# Altium PCB PCB_TPS54622.PcbDoc
Units mil, origin at the board's own origin, x right, y up, seen from the top; angles counter-clockwise.
Board outline 1230 x 1255 mil, 2 copper layers (Top Layer, Bottom Layer); 18 components, 11 nets, 53 pads, 0 vias.
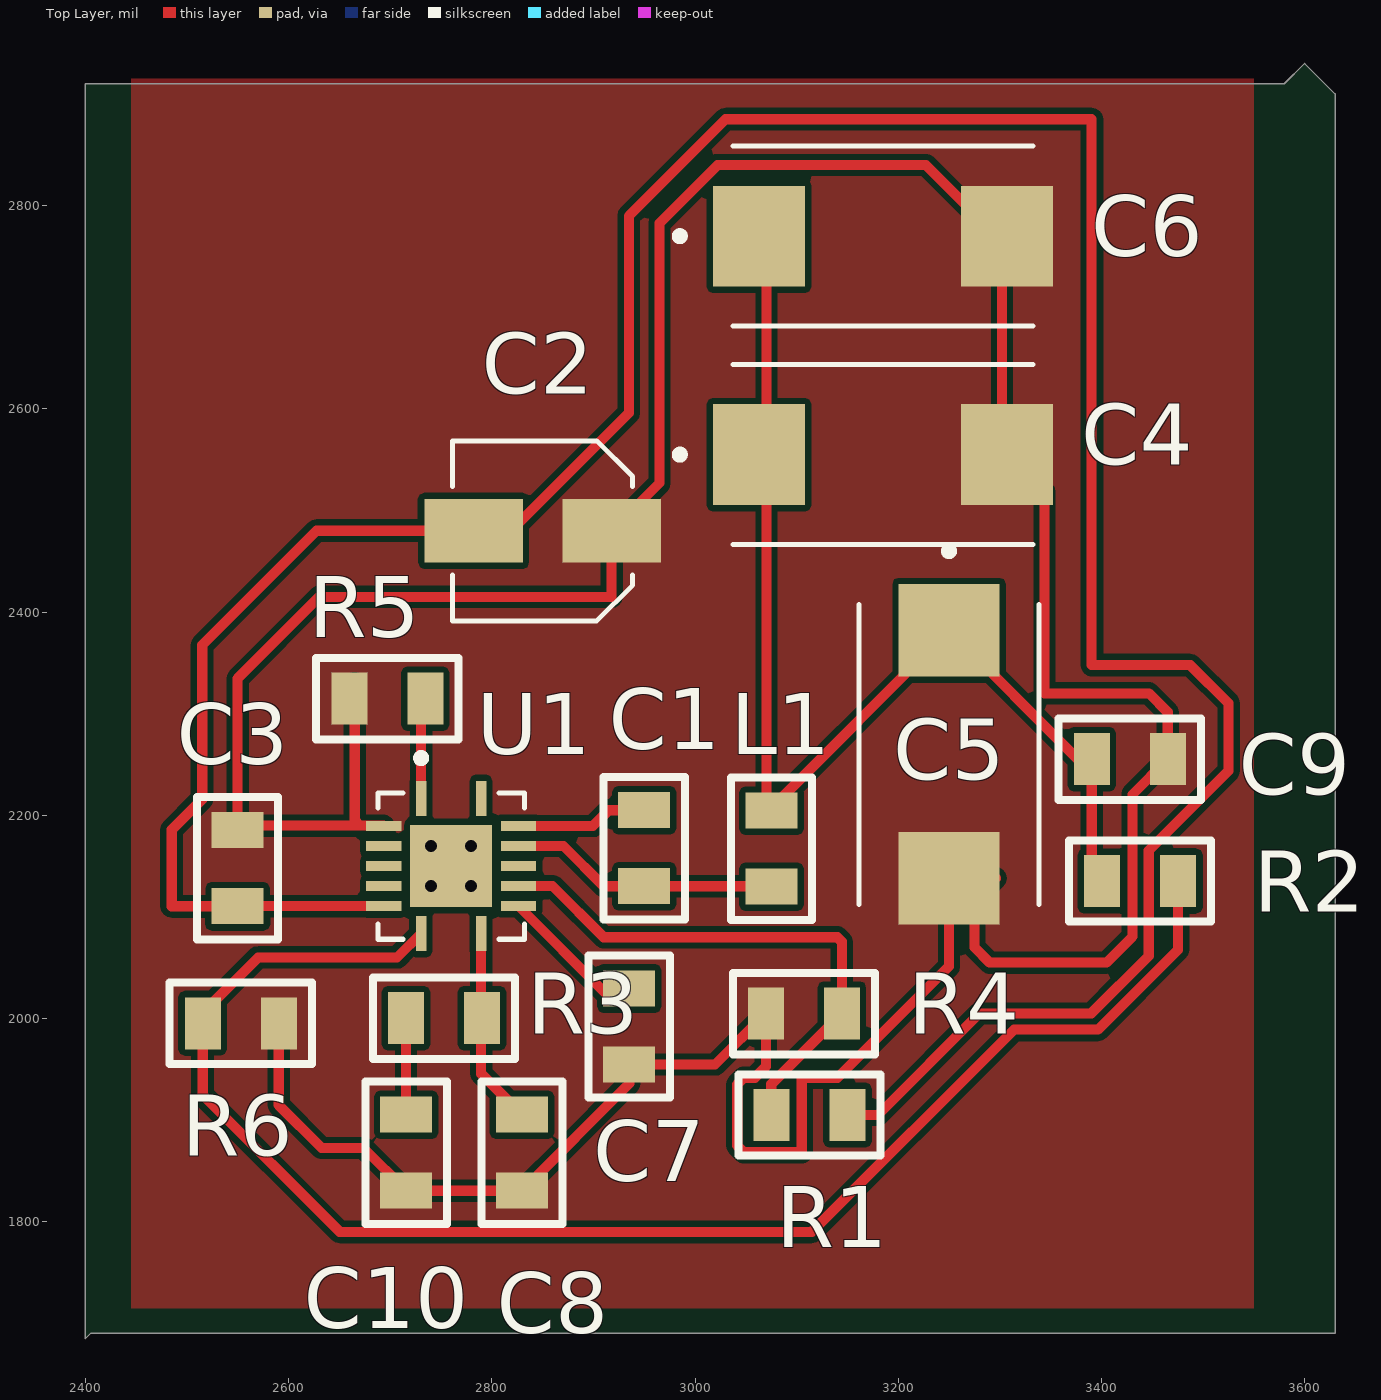
[diagram p0: Top Layer view]
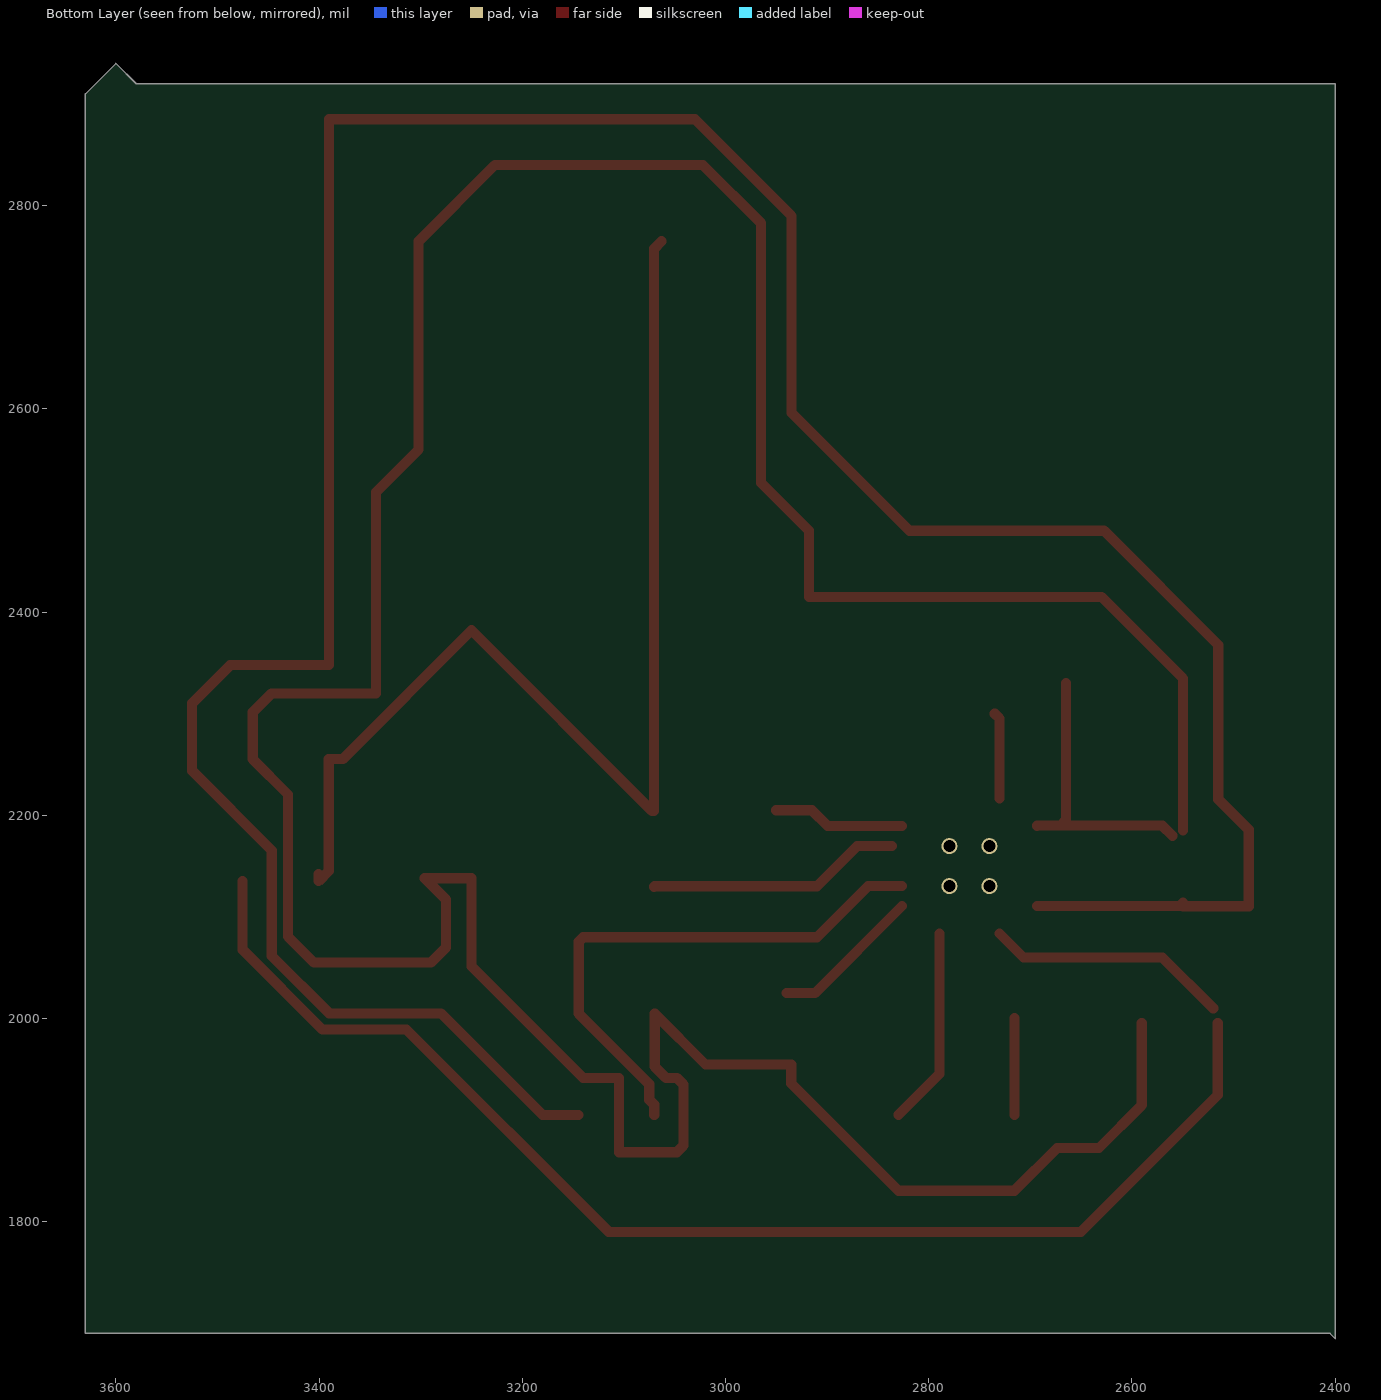
[diagram p1: Bottom Layer view, seen from below]
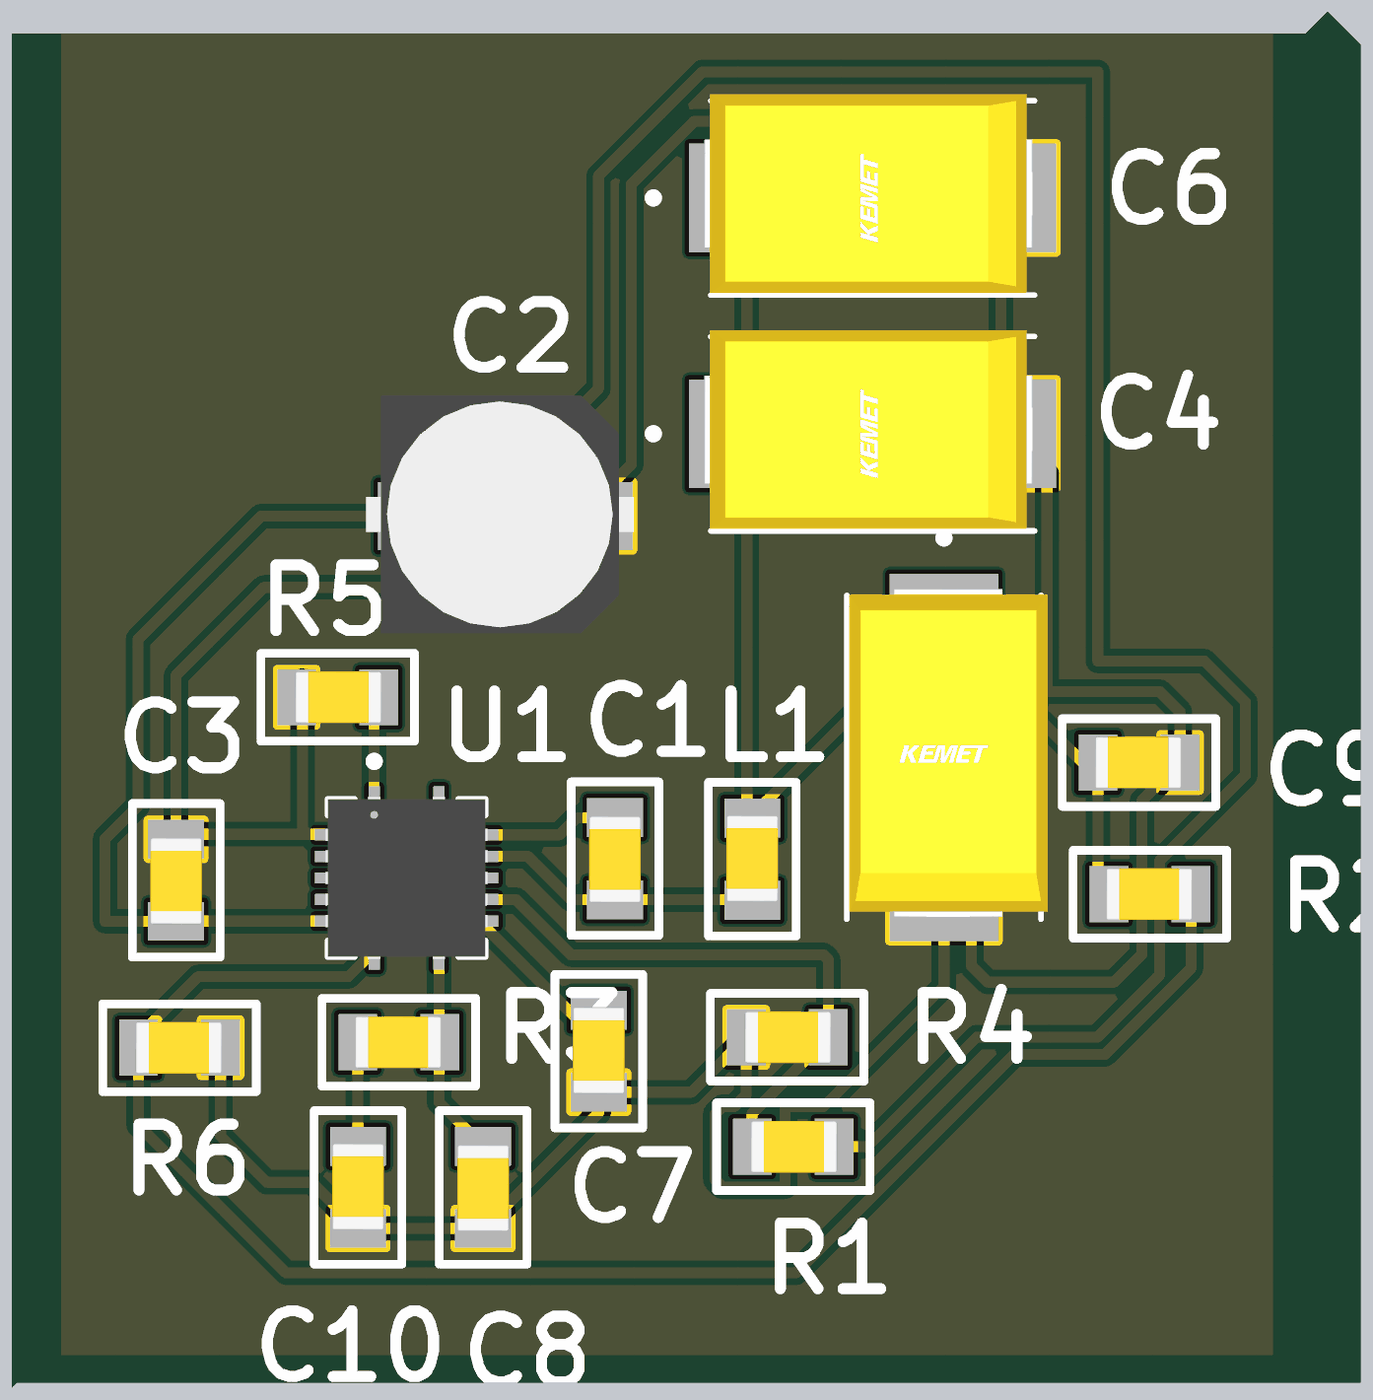
[diagram p2: 3D render of the assembled board from above, using the file's embedded part models]

## Layer stack, top to bottom
Top Solder: solder mask 0.4, Solder Resist, Dk 3.5
Top Layer: signal copper 1.4
Dielectric 1: dielectric 12.6, FR-4, Dk 4.8
Bottom Layer: signal copper 1.4
Bottom Solder: solder mask 0.4, Solder Resist, Dk 3.5

## Board outline
2400,2920 3580,2920 3600,2940 3630,2910 3630,1690 2405,1690 2400,1685

## Design rules (kind name [scope] priority, off if disabled: settings)
Clearance [All] p1: gap=6 ignorepadtopadclearanceinfootprint=FALSE
PolygonConnect [All] p1: connectstyle=Direct reliefconductorwidth=10 reliefentries=4 polygonreliefangle="90 Angle" airgapwidth=10
RoutingVias [All] p1: holewidth=28 width=50 viastyle="Through Hole" minholewidth=28 minwidth=50 maxholewidth=28 maxwidth=50
SolderMaskExpansion [All] p1: expansion=4
Width [All] p1: maxlimit=10 minlimit=10 preferedwidth=10
30 further rules are at their usual default settings.

## Classes and differential pairs
component class TPS54622_Schematic: C1 C2 C3 C4 C5 C7 C8 C9 C10 L1 R1 R2 R3 R4 R5 R6 U1

## Components (designator, comment, footprint, x,y, rotation, side; value= is the part's Value field where it differs from the comment)
C1 "0.1uF" C/R0805 2950.24,2164.72 r270 top
C2 "27uF" CAPAE430X550N 2850,2480 r180 top
C3 "4.7uF" C/R0805 2550,2145 r270 top
C4 "10uF_New" CAPPM7343X310N 3185,2555 r0 top
C5 "10uF_New" CAPPM7343X310N 3250,2260 r270 top
C6 "10uF_New" CAPPM7343X310N 3185,2770 r0 top
C7 "2.2nF" C/R0805 2935,1995 r90 top
C8 "12pF" C/R0805 2830,1865 r270 top
C9 "47uF" C/R0805 3425,2255 r180 top
C10 "6.2nF" C/R0805 2715.47,1870.75 r90 top
L1 "3.3uH" C/R0805 3075,2170 r90 top
R1 "105Kohms" C/R0805 3115.47,1905.24 r0 top
R2 "191kohms" C/R0805 3435,2135 r180 top
R3 "10kohm" C/R0805 2750,2000 r180 top
R4 "37.4kohms" C/R0805 3110,2005 r0 top
R5 "28.7Kohm" C/R0805 2700,2315 r0 top
R6 "10kohm" C/R0805 2550,1995 r180 top
U1 "TPS54622RHLR" QFN50P350X350X100-15N 2759.92,2150.04 r0 top

## Footprints (in the part's own frame and the unit in brackets; to place one, negate y for a bottom-side part, rotate by r counter-clockwise, add the part's x,y. Pads: shape width x height; smd on the part's side, far side on the other; paste and mask are expansions set on the pad)
C/R0805 [mm]
  rect 0.9x1.3 smd: 1(-1.023,-0.006) 2(0.877,-0.006)
  silkscreen extent -1.85,-1.02 1.71,1.01, body extent -1.06,-0.61 0.94,0.59, height 0.96
CAPAE430X550N [mm]
  rect 2.46x1.58 smd: 1(-1.725,0) 2(1.725,0)
  silkscreen extent -2.25,-2.25 2.25,2.25, body extent -2.97,-2.79 3.23,2.72, height 6.05
CAPPM7343X310N [mm]
  rect 2.31x2.52 smd: 1(-3.1,0) 2(3.1,0)
  silkscreen extent -5.18,-2.25 3.75,2.25, body extent -3.9,-2.2 3.7,2.4, height 3.11
QFN50P350X350X100-15N [mm]
  rect 0.26x0.88 smd: 1(-0.75,1.685) 7(-0.75,-1.685) 8(0.75,-1.685) 14(0.75,1.685)
  rect 0.88x0.26 smd: 2(-1.685,1) 3(-1.685,0.5) 4(-1.685,0) 5(-1.685,-0.5) 6(-1.685,-1) 9(1.685,-1) 10(1.685,-0.5) 11(1.685,0) 12(1.685,0.5) 13(1.685,1)
  rect 2.05x2.05 smd: 15(0,0)
  round 0.4 hole 0.3: 15_1(0.5,0.5) 15_2(-0.5,0.5) 15_3(-0.5,-0.5) 15_4(0.5,-0.5)
  silkscreen extent -1.83,-1.83 1.83,2.8, body extent -1.88,-1.88 1.88,1.88, height 0.74

## Part data
C1: library part C0805C104Z5VACTU, "KEMET         C0805C104Z5VACTU.             CERAMIC CAPACITOR, 0.1UF, 50V, Y5V, +80,-20%, 0805", Capacitance=0.1μF, Capacitance Tolerance="+80%, -20%", Ceramic Capacitor Case="0805 [2012 Metric]", Dielectric Characteristic=Y5V, Manufacturer=KEMET, Operating Temperature Max=85°C, Operating Temperature Min=-30°C, Voltage Rating=50V, Automotive Qualification Standard=-, ComponentLink1Description=http://www.alliedelec.com/m/d/9bfe7773041ffe9d406e68bc7b377fdd.pdf?src-supplier=Allied+Electronics, ComponentLink1URL=http://www.alliedelec.com/m/d/9bfe7773041ffe9d406e68bc7b377fdd.pdf?src-supplier=Allied+Electronics, ComponentLink2Description=https://www.verical.com/server-webapp/html/getDatasheet?partID=37101&src-supplier=Verical, ComponentLink2URL=https://www.verical.com/server-webapp/html/getDatasheet?partID=37101&src-supplier=Verical, ComponentLink3Description=https://www.verical.com/server-webapp/html/getDatasheet?partID=321176&src-supplier=Verical, ComponentLink3URL=https://www.verical.com/server-webapp/html/getDatasheet?partID=321176&src-supplier=Verical, ComponentLink4Description=http://www.farnell.com/datasheets/2123124.pdf?src-supplier=Element14, ComponentLink4URL=http://www.farnell.com/datasheets/2123124.pdf?src-supplier=Element14, Manufacturer Part Number=C0805C104Z5VACTU, MSL="MSL 1 - Unlimited", Packaging="Cut Tape", Pricing 1="1=0.1, 10=0.057, 100=0.0254, 500=0.0182, 1000=0.0143 (USD)", Product Range="C Series", Stock 1=1249727, Supplier 1=Digi-Key, SVHC="No SVHC (15-Jun-2015)"
C2: library part 25SVPF27MX, "CAP ALUM POLY 27UF 20% 25V SMD", Capacitance=27μF, Capacitance Tolerance="± 20%", Capacitor Case Style="Radial Can - SMD", Life Time @ Temperature="5000 hours @ 105°C", Manufacturer=Panasonic, Operating Temperature Max=105°C, Operating Temperature Min=-55°C, Ripple Current AC=2.45A, Voltage Rating=25V, ComponentLink1Description=http://www.mouser.com/ds/2/315/AAB8000C177-947360.pdf?src-supplier=Mouser, ComponentLink1URL=http://www.mouser.com/ds/2/315/AAB8000C177-947360.pdf?src-supplier=Mouser, ComponentLink2Description=http://www.farnell.com/datasheets/1734360.pdf?src-supplier=Element14, ComponentLink2URL=http://www.farnell.com/datasheets/1734360.pdf?src-supplier=Element14, ComponentLink3Description=http://www.alliedelec.com/m/d/9b7b01c855a68cc875be7e3560c8e95f.pdf?src-supplier=Allied+Electronics, ComponentLink3URL=http://www.alliedelec.com/m/d/9b7b01c855a68cc875be7e3560c8e95f.pdf?src-supplier=Allied+Electronics, ComponentLink4Description=http://www.farnell.com/datasheets/2059634.pdf?src-supplier=Farnell, ComponentLink4URL=http://www.farnell.com/datasheets/2059634.pdf?src-supplier=Farnell, Diameter=5mm, ESR=0.04ohm, Height=5.9mm, Manufacturer Part Number=25SVPF27MX, Packaging="Cut Tape", Pricing 1="1=1.02, 10=0.809, 100=0.6065, 500=0.4583 (USD)", Product Range="PANASONIC - SVPF Series", Stock 1=1154, Supplier 1=Digi-Key, SVHC="To Be Advised"
C3: library part CC0805ZRY5V6BB475, "CAP CER 4.7UF 10V Y5V 0805", Capacitance=4.7μF, Manufacturer=Yageo, Operating Temperature="-30°C ~ 85°C", Package / Case="0805 (2012 Metric)", Ratings=-, Standard Package=1, Temperature Coefficient="Y5V (F)", Tolerance="-20%, +80%", Voltage - Rated=10V, Applications="General Purpose", Category=Capacitors, ComponentLink1Description=http://www.yageo.com/documents/recent/UPY-GPHC_Y5V_6.3V-to-50V_8.pdf?src-supplier=Digi-Key, ComponentLink1URL=http://www.yageo.com/documents/recent/UPY-GPHC_Y5V_6.3V-to-50V_8.pdf?src-supplier=Digi-Key, ComponentLink2Description=https://www.verical.com/server-webapp/html/getDatasheet?partID=251807&src-supplier=Verical, ComponentLink2URL=https://www.verical.com/server-webapp/html/getDatasheet?partID=251807&src-supplier=Verical, ComponentLink3Description=http://www.yageo.com/documents/recent/UPY-GPHC_Y5V_6.3V-to-50V_5.pdf?src-supplier=Avnet, ComponentLink3URL=http://www.yageo.com/documents/recent/UPY-GPHC_Y5V_6.3V-to-50V_5.pdf?src-supplier=Avnet, ComponentLink4Description=http://www.yageo.com/documents/recent/UPY-GPHC_Y5V_6.3V-to-50V_5.pdf?src-supplier=Avnet+Europe, ComponentLink4URL=http://www.yageo.com/documents/recent/UPY-GPHC_Y5V_6.3V-to-50V_5.pdf?src-supplier=Avnet+Europe, ComponentLink5Description=http://www.farnell.com/datasheets/1132289.pdf?src-supplier=Element14, ComponentLink5URL=http://www.farnell.com/datasheets/1132289.pdf?src-supplier=Element14, ComponentLink6Description=http://www.mouser.com/ds/2/447/Yageo_UPY-GP_NP0_16V-to-50V_9-358835.pdf?src-supplier=Mouser, ComponentLink6URL=http://www.mouser.com/ds/2/447/Yageo_UPY-GP_NP0_16V-to-50V_9-358835.pdf?src-supplier=Mouser, ComponentLink7Description=http://www.yageo.com/documents/recent/UPY-GPHC_Y5V_6.3V-to-50V_5_revised.pdf?src-supplier=Future+Electronics, ComponentLink7URL=http://www.yageo.com/documents/recent/UPY-GPHC_Y5V_6.3V-to-50V_5_revised.pdf?src-supplier=Future+Electronics, Family="Ceramic Capacitors", Featured Product="Yageo - High Capacitance MLCC", Features=-, Height - Seated (Max)=-, Lead Spacing=-, Lead Style=-, Manufacturer Part Number=CC0805ZRY5V6BB475, Mounting Type="Surface Mount, MLCC", Online Catalog="CC Series", Other Names=311-1371-6, Packaging="Digi-Reel?? ?", Pricing 1="1=0.19, 10=0.132, 100=0.0667, 500=0.0456, 1000=0.0404 (USD)", Product Training Modules="Multilayer Ceramic Capacitors High Capacitance MLCCs", Series=CC, Size / Dimension="0.079\" L x 0.049\" W (2.00mm x 1.25mm)", Stock 1=117685, Supplier 1=Digi-Key, Thickness (Max)="0.033\" (0.85mm)"
C4 C5 C6: library part T495D106M035ATE125, "CAP TANT 10UF 35V 20% 2917", Capacitance=10μF, Capacitance Tolerance="± 20%", Capacitor Case Style="2917 ^7343 Metric]", Manufacturer=KEMET, Operating Temperature Max=125°C, Operating Temperature Min=-55°C, Voltage Rating=35V, ComponentLink1Description=https://www.verical.com/server-webapp/html/getDatasheet?partID=44813&src-supplier=Verical, ComponentLink1URL=https://www.verical.com/server-webapp/html/getDatasheet?partID=44813&src-supplier=Verical, ComponentLink2Description=http://www.farnell.com/datasheets/1761160.pdf?src-supplier=Element14, ComponentLink2URL=http://www.farnell.com/datasheets/1761160.pdf?src-supplier=Element14, ComponentLink3Description=http://www.farnell.com/datasheets/1744560.pdf?src-supplier=Element14, ComponentLink3URL=http://www.farnell.com/datasheets/1744560.pdf?src-supplier=Element14, ESR=0.125ohm, Manufacturer Part Number=T495D106M035ATE125, Packaging="Full Reel", Pricing 1="1=1.79, 10=1.449, 100=1.1066 (USD)", Product Range="KEMET - T495 Series", Stock 1=5675, Supplier 1=Digi-Key
C7: library part C0805C222K5RAC, "Cap Ceramic 0.0022uF 50V X7R 10% Pad SMD 0805 125C Bulk", Capacitance Tolerance=±10%, Manufacturer=KEMET, Rated voltage=50VDC, Temperature range=-55...+125°C, Capacitance=2.2nF, Ceramic type=X7R, ComponentLink1Description=https://www1.elfa.se/data1/wwwroot/assets/datasheets/slCeramic-Chip-Condensers_e.pdf?src-supplier=Distrelec, ComponentLink1URL=https://www1.elfa.se/data1/wwwroot/assets/datasheets/slCeramic-Chip-Condensers_e.pdf?src-supplier=Distrelec, Construction form=0805, Manufacturer Part Number=C0805C222K5RAC, Pricing 1="4000=0.009, 8000=0.008, 24000=0.007, 48000=0.006 (USD)", Stock 1=148000, Supplier 1=Mouser
C8: library part CC0805JRNPO9BN120, "CAP CER 12PF 50V C0G/NPO 0805", Manufacturer=Yageo, Operating Temperature="-55°C ~ 125°C", Package / Case="0805 (2012 Metric)", Ratings=-, Standard Package=1, Temperature Coefficient="C0G, NP0", Tolerance=±5%, Voltage - Rated=50V, Applications="General Purpose", Capacitance=12pF, Catalog Drawings=CC_0805_0.6, Category=Capacitors, ComponentLink1Description=https://www.verical.com/server-webapp/html/getDatasheet?partID=38285&src-supplier=Verical, ComponentLink1URL=https://www.verical.com/server-webapp/html/getDatasheet?partID=38285&src-supplier=Verical, ComponentLink2Description=http://www.yageo.com/documents/recent/UPY-GP_NP0_16V-to-50V_16.pdf?src-supplier=Digi-Key, ComponentLink2URL=http://www.yageo.com/documents/recent/UPY-GP_NP0_16V-to-50V_16.pdf?src-supplier=Digi-Key, ComponentLink3Description=http://www.yageo.com/documents/recent/UPY-GP_NP0_16V-to-50V_8.pdf?src-supplier=Avnet, ComponentLink3URL=http://www.yageo.com/documents/recent/UPY-GP_NP0_16V-to-50V_8.pdf?src-supplier=Avnet, ComponentLink4Description=http://www.yageo.com/documents/recent/UPY-GP_NP0_16V-to-50V_8.pdf?src-supplier=Avnet+Europe, ComponentLink4URL=http://www.yageo.com/documents/recent/UPY-GP_NP0_16V-to-50V_8.pdf?src-supplier=Avnet+Europe, ComponentLink5Description=https://produktinfo.conrad.com/datenblaetter/425000-449999/445317-da-01-en-KERKO_CHIP_0805_NP0_12pF_5Proz_50V_G.pdf?src-supplier=Conrad, ComponentLink5URL=https://produktinfo.conrad.com/datenblaetter/425000-449999/445317-da-01-en-KERKO_CHIP_0805_NP0_12pF_5Proz_50V_G.pdf?src-supplier=Conrad, Family="Ceramic Capacitors", Featured Product="Commodity Multilayer Ceramic Capacitors – CC Series", Features=-, Height - Seated (Max)=-, Lead Spacing=-, Lead Style=-, Manufacturer Part Number=CC0805JRNPO9BN120, Mounting Type="Surface Mount, MLCC", Online Catalog="CC Series", Other Names="311-1100-6 311-1296-6 311-1296-6-ND", Packaging="Digi-Reel?? ?", Pricing 1="1=0.11, 10=0.079, 100=0.0351, 500=0.0251, 1000=0.0197 (USD)", Product Training Modules="Multilayer Ceramic Capacitors", Series=CC, Size / Dimension="0.079\" L x 0.049\" W (2.00mm x 1.25mm)", Stock 1=77774, Supplier 1=Digi-Key, Thickness (Max)="0.024\" (0.60mm)"
C9: library part GRM21BR60J476ME15K, "47μF 6.3V Ceramic Capacitor X5R 0805 (2012 Metric) 0.079\" L x 0.049\" W (2.00mm x 1.25mm)", Capacitance=47μF, Manufacturer=Murata, Operating Temperature="-55°C ~ 85°C", Package / Case="0805 (2012 Metric)", Ratings=-, Temperature Coefficient=X5R, Tolerance=±20%, Voltage - Rated=6.3V, Applications="General Purpose", Categories=Capacitors, ComponentLink1Description=http://www.mouser.com/ds/2/281/c02e-2905.pdf?src-supplier=Mouser, ComponentLink1URL=http://www.mouser.com/ds/2/281/c02e-2905.pdf?src-supplier=Mouser, ComponentLink2Description=https://search.murata.co.jp/Ceramy/image/img/A01X/G101/ENG/GRM21BR60J476ME15-01.pdf?src-supplier=Digi-Key, ComponentLink2URL=https://search.murata.co.jp/Ceramy/image/img/A01X/G101/ENG/GRM21BR60J476ME15-01.pdf?src-supplier=Digi-Key, Features=-, Height - Seated (Max)=-, Lead Spacing=-, Lead Style=-, Manufacturer Part Number=GRM21BR60J476ME15K, Mounting Type="Surface Mount, MLCC", Packaging="Tape & Reel (TR)", Part Status="Not For New Designs", Pricing 1="1=0.48, 10=0.339, 100=0.2236, 500=0.1656, 1000=0.1408, 2500=0.1325, 5000=0.1242 (USD)", Series=GRM, Size / Dimension="0.079 L x 0.049 W (2.00mm x 1.25mm)", Stock 1=16666, Supplier 1=Digi-Key, Thickness (Max)="0.057 (1.45mm)"
C10: library part GRM2195C1H622JA01D, "CAP CER 6200PF 50V C0G/NP0 0805", Capacitance Value="0.0062 uF", Dielectric=C0G, Manufacturer=Murata, Operating Temperature="-55 to 125 °C", Package/Case=0805, Tolerance="5 %", Voltage="50 Vdc", Category="Capacitor Ceramic Multilayer", ComponentLink1Description=https://www.murata.com/~/media/webrenewal/support/library/catalog/products/capacitor/mlcc/c02e.ashx?la=en-us&src-supplier=Digi-Key, ComponentLink1URL=https://www.murata.com/~/media/webrenewal/support/library/catalog/products/capacitor/mlcc/c02e.ashx?la=en-us&src-supplier=Digi-Key, ComponentLink2Description=http://www.mouser.com/ds/2/281/c02e-2905.pdf?src-supplier=Mouser, ComponentLink2URL=http://www.mouser.com/ds/2/281/c02e-2905.pdf?src-supplier=Mouser, Construction=Flat, Manufacturer Part Number=GRM2195C1H622JA01D, Mounting="Surface Mount", Packaging="Tape & Reel", Pricing 1="1=0.32, 10=0.219, 100=0.124, 500=0.0875, 1000=0.0766 (USD)", Product Depth="1.25 mm", Product Height="0.85 mm", Product Length="2 mm", Rad Hard=No, Stock 1=21992, Supplier 1=Digi-Key
L1: library part BRC2012T3R3MD, "INDUCTOR, 3.3UH, 870MA, 20%, 300MHZ; Core Material:Ferrite; DC Current Rating:870mA; DC Resistance Max:0.17ohm; Inductance:3.3μH; Inductance Tolerance:± 20%; Inductor Case Style:0805; Lead Spacing:1mm; No. of Pins:2 ;RoHS Compliant: Yes", Current - Saturation=800mA, Current Rating=870mA, DC Resistance (DCR)="221 mOhm Max", Frequency - Self Resonant=300MHz, Frequency - Test=1MHz, Inductance=3.3μH, Manufacturer="Taiyo Yuden", Operating Temperature="-40°C ~ 105°C", Package / Case="0805 (2012 Metric)", Standard Package=2,000, Tolerance=±20%, Category="Inductors, Coils, Chokes", ComponentLink1Description=https://www.verical.com/server-webapp/html/getDatasheet?partID=639073&src-supplier=Verical, ComponentLink1URL=https://www.verical.com/server-webapp/html/getDatasheet?partID=639073&src-supplier=Verical, ComponentLink2Description=http://www.yuden.co.jp/ut/product/category/inductor/BRC2012T3R3MD.pdf?src-supplier=Newark, ComponentLink2URL=http://www.yuden.co.jp/ut/product/category/inductor/BRC2012T3R3MD.pdf?src-supplier=Newark, ComponentLink3Description=http://ds.yuden.co.jp/TYCOMPAS/ut/detail.do?productNo=BRC2012T3R3MD&fileName=BRC2012T3R3MD_SS&mode=specSheetDownload&src-supplier=Digi-Key, ComponentLink3URL=http://ds.yuden.co.jp/TYCOMPAS/ut/detail.do?productNo=BRC2012T3R3MD&fileName=BRC2012T3R3MD_SS&mode=specSheetDownload&src-supplier=Digi-Key, ComponentLink4Description=http://documents.rs-components.com/techlib://itc_doclist_GB.htm?stockno=7557540&src-supplier=RSComponents, ComponentLink4URL=http://documents.rs-components.com/techlib://itc_doclist_GB.htm?stockno=7557540&src-supplier=RSComponents, EDA / CAD Models="Download from Accelerated Designs", Family="Fixed Inductors", Height - Seated (Max)="0.055\" (1.40mm)", Manufacturer Part Number=BRC2012T3R3MD, Mounting Type="Surface Mount", Online Catalog="BR Series", Other Names="587-2906-2   / BR C2012T3R3MD   / LQ BR C2012T3R3MD", Packaging="Tape & Reel (TR)", Pricing 1="1=0.35, 10=0.308, 100=0.2119, 500=0.1811, 1000=0.1387 (USD)", Series=BR, Shielding=Unshielded, Size / Dimension="0.079\" L x 0.049\" W (2.00mm x 1.25mm)", Stock 1=19368, Supplier 1=Digi-Key, Type=Wirewound
R1: library part ERA-6AEB1053V, "RESISTOR, 0805, 105K, 0.1%, 0.125W", Manufacturer=Panasonic, Operating Temperature Max=155°C, Operating Temperature Min=-55°C, Operating Temperature Range="-55°C to +155°C", Power Rating=125mW, Resistance=105kohm, Resistance Tolerance="± 0.1%", Resistor Case Style="0805 [2012 Metric]", Resistor Element Material="Thin Film", Resistor Mounting=SMD, Temperature Coefficient="± 25ppm/°C", Voltage Rating=100V, ComponentLink1Description=http://uk.rs-online.com/webdocs/0eb1/0900766b80eb1d8c.pdf?src-supplier=RSComponents, ComponentLink1URL=http://uk.rs-online.com/webdocs/0eb1/0900766b80eb1d8c.pdf?src-supplier=RSComponents, ComponentLink2Description=http://www.farnell.com/datasheets/485442.pdf?src-supplier=Farnell, ComponentLink2URL=http://www.farnell.com/datasheets/485442.pdf?src-supplier=Farnell, ComponentLink3Description=http://industrial.panasonic.com/www-data/pdf/AOA0000/AOA0000CE26.pdf?src-supplier=Avnet+Europe, ComponentLink3URL=http://industrial.panasonic.com/www-data/pdf/AOA0000/AOA0000CE26.pdf?src-supplier=Avnet+Europe, ComponentLink4Description=http://www.farnell.com/datasheets/485442.pdf?src-supplier=Element14, ComponentLink4URL=http://www.farnell.com/datasheets/485442.pdf?src-supplier=Element14, ComponentLink5Description=http://www.produktinfo.conrad.com/datenblaetter/1100000-1199999/001181353-da-01-en-WIDERSTAND_ERA_0805_105K_0_1__5000ST.pdf?src-supplier=Conrad, ComponentLink5URL=http://www.produktinfo.conrad.com/datenblaetter/1100000-1199999/001181353-da-01-en-WIDERSTAND_ERA_0805_105K_0_1__5000ST.pdf?src-supplier=Conrad, External Depth=1.25mm, External Length / Height=0.5mm, External Width=2mm, Manufacturer Part Number=ERA-6AEB1053V, No. of Pins=2, Packaging=Reel, Pricing 1="1=0.36, 10=0.302, 100=0.1182, 1000=0.0495, 2500=0.0454 (USD)", Product Range="PANASONIC - ERA", Series=ERA, Stock 1=9772, Supplier 1=Digi-Key
R2: library part ERA-6AEB1913V, "Res Thin Film 0805 191K Ohm 0.1% 1/8W 25ppm/C Molded SMD Punched Carrier T/R", Manufacturer=Panasonic, Operating Temperature Max=155°C, Operating Temperature Min=-55°C, Operating Temperature Range="-55°C to +155°C", Power Rating=125mW, Resistance=191kohm, Resistance Tolerance="± 0.1%", Resistor Case Style="0805 [2012 Metric]", Resistor Element Material="Thin Film", Resistor Mounting=SMD, Temperature Coefficient="± 25ppm/°C", Voltage Rating=100V, ComponentLink1Description=http://www.farnell.com/datasheets/485442.pdf?src-supplier=Farnell, ComponentLink1URL=http://www.farnell.com/datasheets/485442.pdf?src-supplier=Farnell, ComponentLink2Description=http://uk.rs-online.com/webdocs/0eb1/0900766b80eb1d8c.pdf?src-supplier=RSComponents, ComponentLink2URL=http://uk.rs-online.com/webdocs/0eb1/0900766b80eb1d8c.pdf?src-supplier=RSComponents, ComponentLink3Description=http://industrial.panasonic.com/www-data/pdf/AOA0000/AOA0000CE26.pdf?src-supplier=Avnet, ComponentLink3URL=http://industrial.panasonic.com/www-data/pdf/AOA0000/AOA0000CE26.pdf?src-supplier=Avnet, ComponentLink4Description=http://www.produktinfo.conrad.com/datenblaetter/1100000-1199999/001181370-da-01-en-WIDERSTAND_ERA_0805_191K_0_1__5000ST.pdf?src-supplier=Conrad, ComponentLink4URL=http://www.produktinfo.conrad.com/datenblaetter/1100000-1199999/001181370-da-01-en-WIDERSTAND_ERA_0805_191K_0_1__5000ST.pdf?src-supplier=Conrad, External Depth=1.25mm, External Length / Height=0.5mm, External Width=2mm, Manufacturer Part Number=ERA-6AEB1913V, No. of Pins=2, Packaging=Reel, Pricing 1="1=0.36, 10=0.302, 100=0.1182, 1000=0.0495, 2500=0.0454 (USD)", Product Range="PANASONIC - ERA", Series=ERA, Stock 1=6723, Supplier 1=Digi-Key
R3 R6: library part LTR10EZPJ103, "RES SMD 10K OHM 1/4W 0805 WIDE", Manufacturer=Rohm, Operating Temperature="-55°C ~ 155°C", Package / Case="Wide 0805 (2012 Metric), 0508", Power (Watts)="0.25W, 1/4W", Resistance (Ohms)=10k, Standard Package=5,000, Supplier Device Package="0805 (2012 Metric)", Temperature Coefficient=±200ppm/°C, Tolerance=±5%, Category=Resistors, ComponentLink1Description=http://www.rohm.com/web/global/datasheet/LTR100JZPD/ltr-e?src-supplier=Digi-Key, ComponentLink1URL=http://www.rohm.com/web/global/datasheet/LTR100JZPD/ltr-e?src-supplier=Digi-Key, Composition="Thick Film", EDA / CAD Models="Download from Accelerated Designs", Family="Chip Resistor - Surface Mount", Features="Automotive AEC-Q200, Pulse Withstanding", Height="0.026\" (0.65mm)", Manufacturer Part Number=LTR10EZPJ103, Number of Terminations=2, Online Catalog="LTR10 Series", Other Names=RHM10KBUTR, Packaging="Tape & Reel (TR)? ?", Pricing 1="1=0.15, 10=0.131, 100=0.0502, 1000=0.0221, 2500=0.0191 (USD)", Series=LTR, Size / Dimension="0.047\" L x 0.079\" W (1.20mm x 2.00mm)", Stock 1=1415, Supplier 1=Digi-Key
R4: library part ERA6AEB3742V, "Metal film resistor 37.4 k? SMD 0805 0.125 W", Manufacturer=Panasonic, Operating Temperature Max=155°C, Operating Temperature Min=-55??C, Operating Temperature Range="-55°C to +155°C", Power Rating=125mW, Resistance=37.4kohm, Resistance Tolerance="± 0.1%", Resistor Case Style="0805 [2012 Metric]", Resistor Element Material="Thin Film", Resistor Mounting=SMD, Resistor Terminals=–, Temperature Coefficient="± 25ppm/°C", Voltage Rating=100V, ComponentLink1Description=http://www.farnell.com/datasheets/485442.pdf?src-supplier=Farnell, ComponentLink1URL=http://www.farnell.com/datasheets/485442.pdf?src-supplier=Farnell, ComponentLink2Description=http://uk.rs-online.com/webdocs/0eb1/0900766b80eb1d8c.pdf?src-supplier=RSComponents, ComponentLink2URL=http://uk.rs-online.com/webdocs/0eb1/0900766b80eb1d8c.pdf?src-supplier=RSComponents, ComponentLink3Description=http://industrial.panasonic.com/www-data/pdf/AOA0000/AOA0000CE26.pdf?src-supplier=Avnet+Europe, ComponentLink3URL=http://industrial.panasonic.com/www-data/pdf/AOA0000/AOA0000CE26.pdf?src-supplier=Avnet+Europe, ComponentLink4Description=https://produktinfo.conrad.com/datenblaetter/450000-474999/458559-da-01-en-WIDERSTAND_0805_ERA.pdf?src-supplier=Conrad, ComponentLink4URL=https://produktinfo.conrad.com/datenblaetter/450000-474999/458559-da-01-en-WIDERSTAND_0805_ERA.pdf?src-supplier=Conrad, External Depth=1.25mm, External Length / Height=0.5mm, External Width=2mm, Manufacturer Part Number=ERA6AEB3742V, MSL=–, No. of Pins=2, Packaging=Reel, Pricing 1="1=0.36, 10=0.302, 100=0.1182, 1000=0.0495, 2500=0.0454 (USD)", Product Range="PANASONIC - ERA", Series=ERA, Stock 1=34770, Supplier 1=Digi-Key, SVHC=–
R5: library part RG2012P-2872-B-T5, "RES SMD 28.7K OHM 0.1% 1/8W 0805", Case Code - in=0805, Case Code - mm=2012, Case Height="0.4 mm", Case Length="2 mm", Case Width="1.25 mm", Manufacturer=Susumu, Operating Temperature Range="- 55 C to + 155 C", Package / Case="0805 (2012 metric)", Power Rating="100 mW", Resistance="28.7 kOhms", Temperature Coefficient="25 PPM / C", Tolerance="0.1 %", Voltage Rating="100 V", Brand=Susumu, ComponentLink1Description=http://www.susumu.co.jp/common/pdf/n_catalog_partition01_en.pdf?src-supplier=Digi-Key, ComponentLink1URL=http://www.susumu.co.jp/common/pdf/n_catalog_partition01_en.pdf?src-supplier=Digi-Key, ComponentLink2Description=http://www.susumu-usa.com/pdf/RG_RM_RGH_DATASHEET.pdf?src-supplier=Future+Electronics, ComponentLink2URL=http://www.susumu-usa.com/pdf/RG_RM_RGH_DATASHEET.pdf?src-supplier=Future+Electronics, Dimensions="1.25 mm W x 2 mm L x 0.4 mm H", Factory Pack Quantity=5000, Manufacturer Part Number=RG2012P-2872-B-T5, Packaging=Reel, Pricing 1="1=0.41, 10=0.318, 100=0.1336, 1000=0.0737, 2500=0.0691 (USD)", Product="Precision Resistors Thin Film SMD", Product Category="Thin Film Resistors - SMD", RoHS=Details, Series=RG, Stock 1=18308, Supplier 1=Digi-Key, Termination Style=SMD/SMT
U1: "IC REG BUCK ADJ 6A SYNC 14QFN", Current - Output=6A, Frequency - Switching="200kHz ~ 1.6MHz", Manufacturer="Texas Instruments", Operating Temperature="-40°C ~ 150°C", Package / Case="14-VFQFN Exposed Pad", Standard Package=3,000, Supplier Device Package="14-QFN Exposed Pad (3.5x3.5)", Voltage - Input="4.5 V ~ 17 V", Voltage - Output="0.6 V ~ 15 V", Category="Integrated Circuits (ICs)", ComponentLink1Description=http://www.ti.com/lit/ds/symlink/tps54622.pdf?src-supplier=Digi-Key, ComponentLink1URL=http://www.ti.com/lit/ds/symlink/tps54622.pdf?src-supplier=Digi-Key, ComponentLink2Description=http://www.ti.com/general/docs/lit/getliterature.tsp?genericPartNumber=TPS54622&&fileType=pdf&src-supplier=Avnet, ComponentLink2URL=http://www.ti.com/general/docs/lit/getliterature.tsp?genericPartNumber=TPS54622&&fileType=pdf&src-supplier=Avnet, ComponentLink3Description=http://www.ti.com/lit/gpn/tps54622?src-supplier=Mouser, ComponentLink3URL=http://www.ti.com/lit/gpn/tps54622?src-supplier=Mouser, Dynamic Catalog="Buck (Step-Down) IC", Family="PMIC - Voltage Regulators - DC DC Switching Regulators", Featured Product="WEBENCH Design Center", Manufacturer Part Number=TPS54622RHLR, Mounting Type="Surface Mount", Number of Outputs=1, Other Names="296-29204-2 / TPS54622RHLR-ND", Output Type=Adjustable, Packaging="Tape & Reel (TR)", Pricing 1="1=4.68, 10=4.207, 100=3.2698, 500=2.828, 1000=2.3508 (USD)", Product Training Modules="Telecom Point of Load Solutions", PWM Type="Current Mode", Series=SWIFT?, Stock 1=16152, Supplier 1=Digi-Key, Synchronous Rectifier=Yes, Type="Step-Down (Buck)"

## Nets (pads, with @x,y where several pads share a name; then routed paths per layer and width w, separated by ;. In a path a pad name is that pad's centre, name@x,y a point inside that pad or via, vN(x,y) a via of type N, cw(c..) or ccw(c..) an arc to the next point about the centre after c; other vN are vias at no path point)
GND: C2.1 C3.1 C4.2 C5.2 C6.2 C7.1 C8.2 C9.1 C10.1 R4.1 R5.1 R6.1 U1.2 | length 3974.4
  Top Layer w10: C3.1 2549.76,2334.76 2630,2415 2917.91,2415 C2.1 2965,2527.09 2965,2782.68 3022.32,2840 3227.05,2840 3302.05,2765 3302.05,2560 C4.2 3344,2518.05 3344,2320 3446.75,2320 3465.28,2301.47 C9.1 3430.56,2220.52 3430.56,2080.56 3405,2055 3290,2055 3275,2070 3275,2116.81 3296.15,2137.95 C5.2 3250,2051.37 3140.22,1941.59 3105,1941.59 3105,1868.41 3047.92,1868.41 3041.48,1874.85 3041.48,1935.15 3047.92,1941.59 3058.73,1941.59 3069.72,1952.59 R4.1 3019.69,1954.72 C7.1 2935.24,1935.94 C8.2 C10.1 2673.62,1872.56 2632.44,1872.56 2590.28,1914.72 R6.1 ; C3.1@2560,2179.8 2570.04,2189.84 2670.16,2189.84 ; R5.1@2665,2330 2665,2195 2670.16,2189.84 ; U1.2 2693.15,2189.84 2670.16,2189.84
NetC1_1: C1.1 U1.13 | length 130.2
  Top Layer w10: U1.13 2899.41,2189.41 2915,2205 C1.1
NetC1_2: C1.2 L1.1 U1.12 | length 250.5
  Top Layer w10: U1.12@2836.26,2169.72 2870.47,2169.72 2910,2130.2 C1.2 3069.76,2130.2 L1.1@3070.24,2129.72
NetC7_2: C7.2 U1.9 | length 149.2
  Top Layer w10: U1.9 2911.93,2025 C7.2@2940,2025
NetC8_1: C8.1 R3.1 U1.8 | length 195.1
  Top Layer w10: U1.8 2789.45,1945.59 C8.1
NetC10_2: C10.2 R3.2 | length 95.1
  Top Layer w10: R3.2 2715.47,1905.51 C10.2
NetR1_1: R1.1 R4.2 U1.10 | length 542.3
  Top Layer w10: U1.10 2859.65,2130.35 2910,2080 3140,2080 3144.53,2075.47 R4.2 3075,1935.24 3075,1920 3070.2,1915.2 R1.1@3070.2,1905
NetR2_1: R2.1 R6.2 U1.7 | length 1509.6
  Top Layer w10: R6.2 2515.47,1924.73 2650.21,1790 3115,1790 3314,1989 3396.63,1989 3475.28,2067.65 R2.1 ; R6.2@2520,2010 2570,2060 2706.69,2060 U1.7
NetR5_2: R5.2 U1.1 | length 85.5
  Top Layer w10: U1.1 2730.39,2295.39 R5.2@2735,2300
Vin: C2.2 C3.2 R1.2 U1.6 | length 3017.9
  Top Layer w10: C3.2 2485,2110.47 2485,2185.82 2515,2215.82 2515,2367.63 2627.37,2480 C2.2 2818.88,2480 2935,2596.12 2935,2790 3030,2885 3390.32,2885 3390.32,2347.79 3487.55,2347.79 3525,2310.34 3525,2243.82 3446.56,2165.38 3446.56,2061.56 3390,2005 3280,2005 3180,1905 R1.2 R1.2@3145,1905 ; C3.2@2549.76,2114.24 2553.33,2110.67 U1.6
Vout: C4.1 C5.1 C6.1 C9.2 L1.2 R2.2 | length 1140.6
  Top Layer w10: C6.1@3062.95,2765 3070.24,2757.72 3070.24,2204.53 3072.48,2204.53 C5.1 3376.81,2255.24 C9.2 3390.47,2145.24 R2.2 R2.2@3400.47,2141.92
pads on no net: U1.3 U1.4 U1.5 U1.11 U1.14 U1.15 U1.15_1 U1.15_2 U1.15_3 U1.15_4

## Polygon pours and split planes (outlines as drawn)
GND on Top Layer "GND" (solid, pour order 2): 2445,2925 3550,2925 3550,1775 3550,1715 2445,1715